# Altium PCB K210-M1W_PCB.pcbdoc
Units mil, origin at the board's own origin, x right, y up, seen from the top; angles counter-clockwise.
Board outline 3119.11 x 2484 mil, 2 copper layers (Top Layer, Bottom Layer); 2 components, 42 nets, 45 pads, 0 vias.
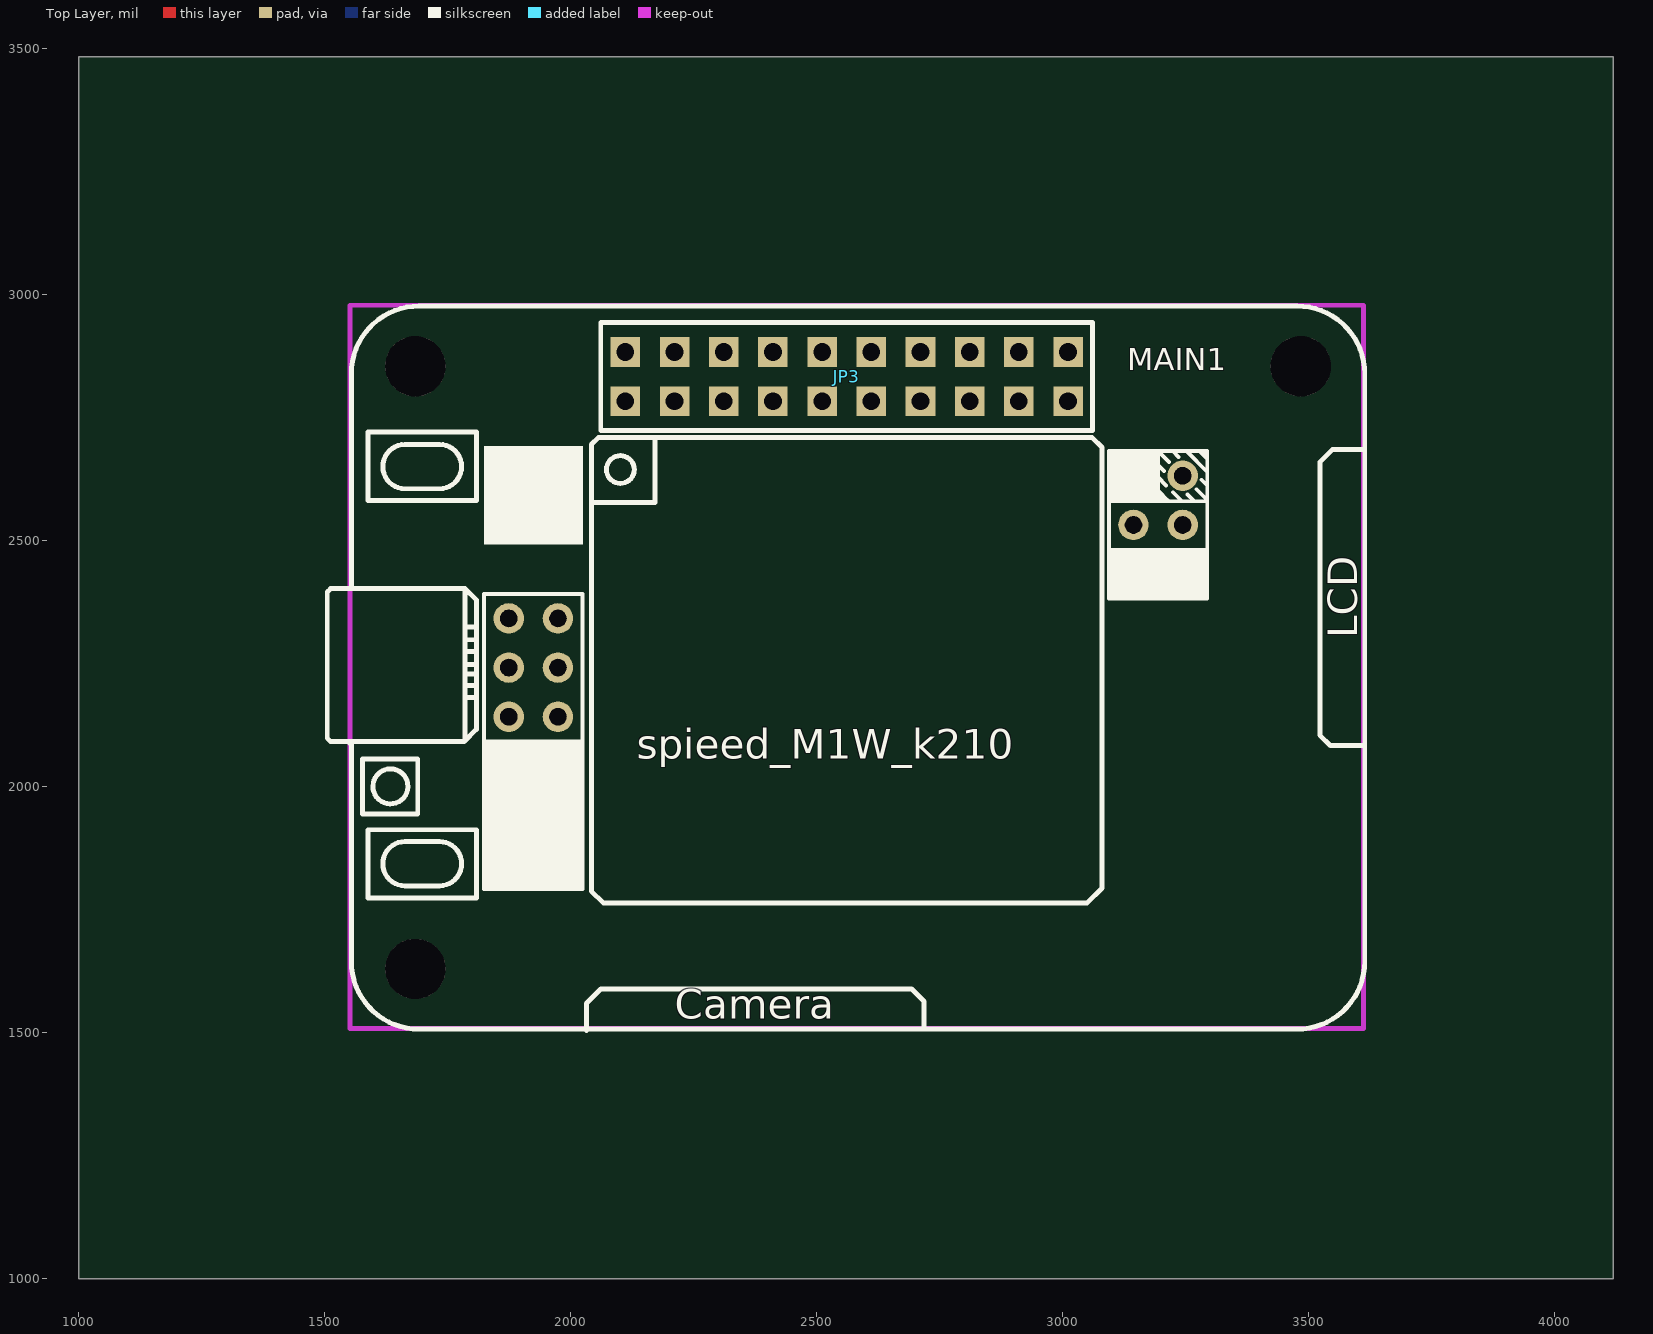
[diagram p0: Top Layer view]
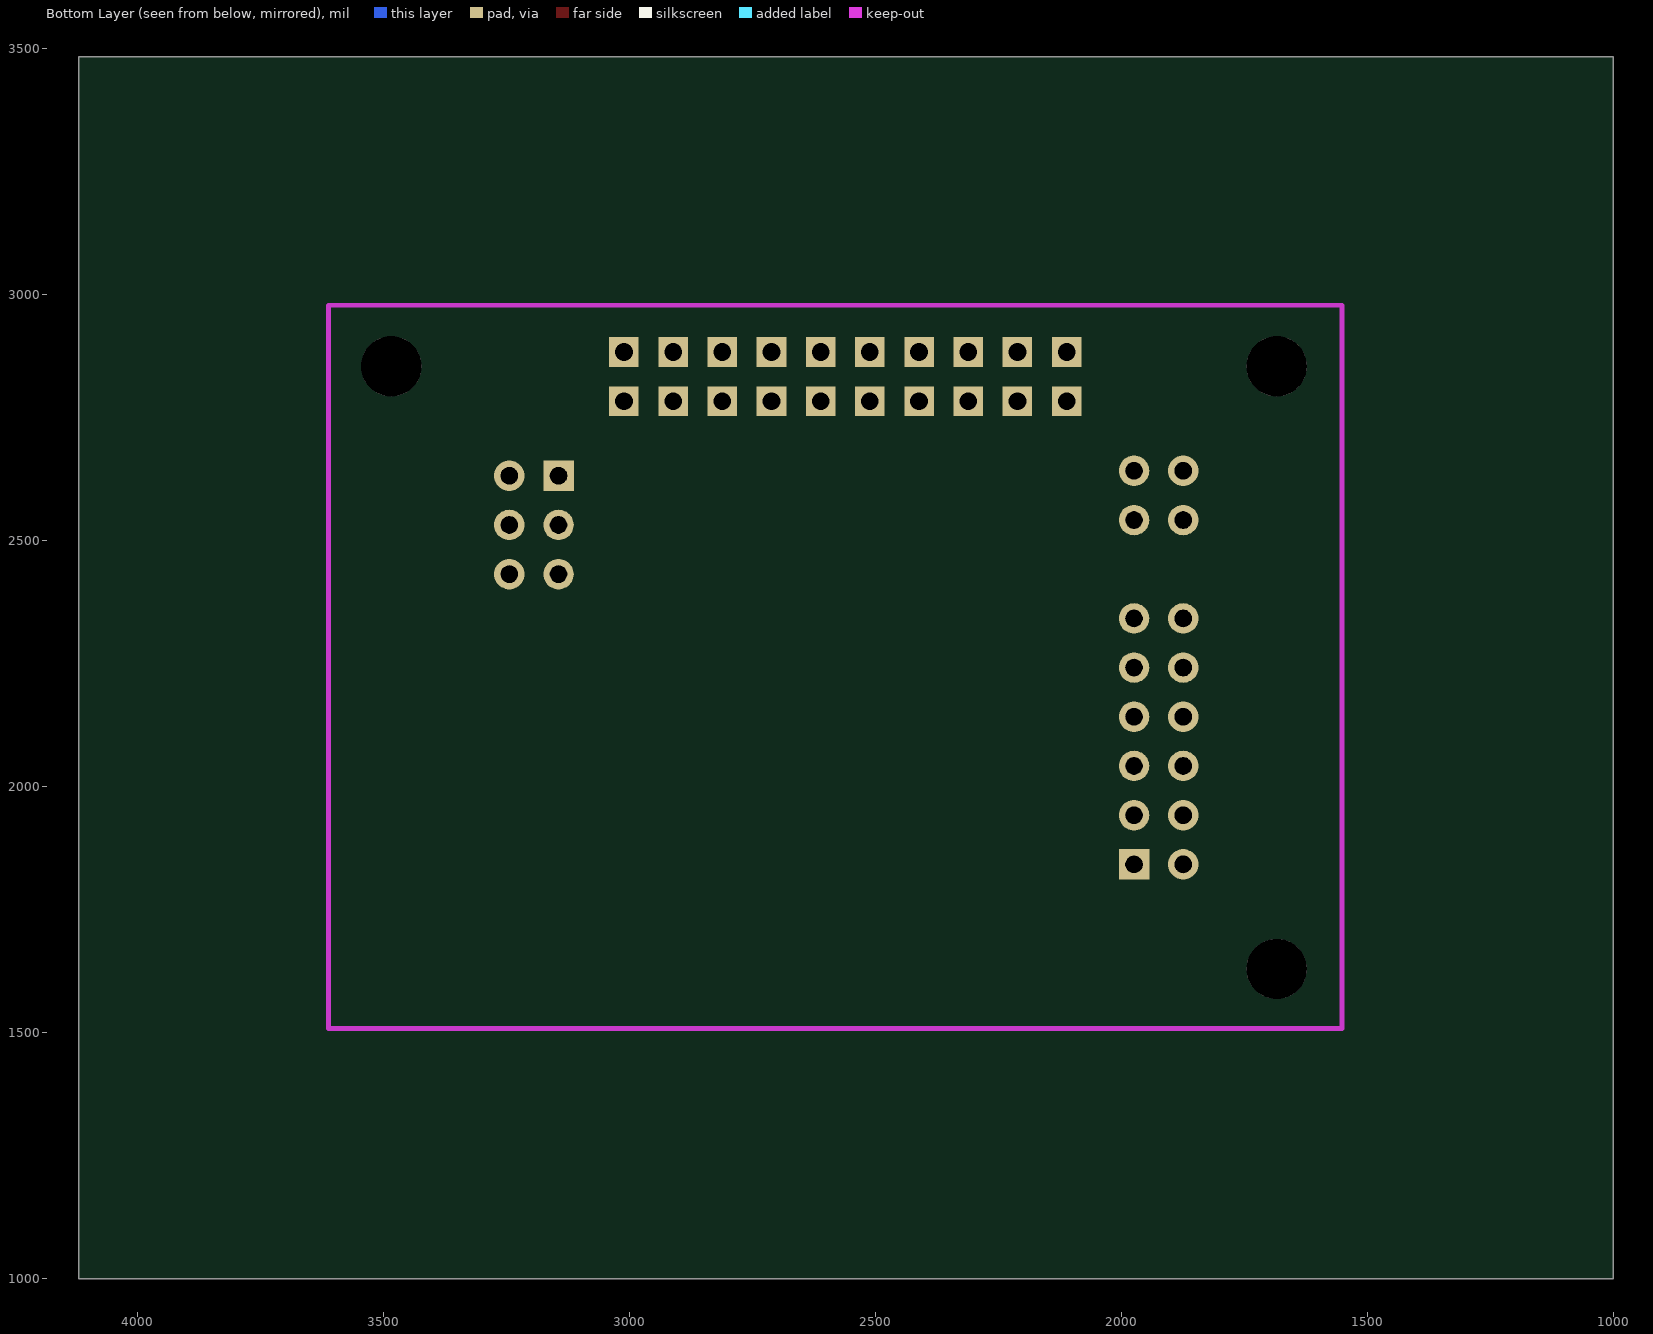
[diagram p1: Bottom Layer view, seen from below]

## Layer stack, top to bottom
Top Solder: solder mask 0.4, Solder Resist, Dk 3.5
Top Layer: signal copper 1.4
Dielectric1: dielectric 12.6, FR-4, Dk 4.8
Bottom Layer: signal copper 1.4
Bottom Solder: solder mask 0.4, Solder Resist, Dk 3.5

## Board outline
4119.11,1000 1000,1000 1000,3484 4119.11,3484

## Design rules (kind name [scope] priority, off if disabled: settings)
Clearance [All] p1: gap=10 ignorepadtopadclearanceinfootprint=FALSE except(0: Arc-Hole Track-Hole SMDPad-Hole THPad-Hole Via-Hole Fill-Hole Poly-Hole Region-Hole Text-Hole)
PolygonConnect [All] p1: connectstyle=Relief reliefconductorwidth=10 reliefentries=4 polygonreliefangle="90 Angle" airgapwidth=10
RoutingVias [All] p1: holewidth=28 width=50 viastyle="Through Hole" minholewidth=28 minwidth=50 maxholewidth=28 maxwidth=50
SolderMaskExpansion [All] p1: expansion=4
Width [All] p1: maxlimit=10 minlimit=10 preferedwidth=10
30 further rules are at their usual default settings.

## Components (designator, comment, footprint, x,y, rotation, side; value= is the part's Value field where it differs from the comment)
JP3 "HEADER 2*10P" "HEADER 2*10P" 2111,2784 r0 top
MAIN1 "maix_dock" MAIX_DOCK 2576,2269 r0 top

## Footprints (in the part's own frame and the unit in brackets; to place one, negate y for a bottom-side part, rotate by r counter-clockwise, add the part's x,y. Pads: shape width x height; smd on the part's side, far side on the other; paste and mask are expansions set on the pad)
"HEADER 2*10P" [mil]
  rect 60x60 hole 36: 1(0,100) 2(0,0) 3(100,100) 4(100,0) 5(200,100) 6(200,0) 7(300,100) 8(300,0) 9(400,100) 10(400,0) 11(500,100) 12(500,0) 13(600,100) 14(600,0) 15(700,100) 16(700,0) 17(800,100) 18(800,0) 19(900,100) 20(900,0)
  silkscreen extent -50,-60 950,160
MAIX_DOCK [mil]
  rect 62x62 hole 35 slot 35.2 at 0 deg: 0(568,363.4) 17(-602,-426.6)
  round 62 hole 35 slot 35.2 at 90 deg: 1(668,363.4) 2(568,263.4) 3(668,263.4) 4(568,163.4) 5(668,163.4) 6(-702,73.4) 7(-602,73.4) 8(-702,-26.6) 9(-602,-26.6) 10(-702,-126.6) 11(-602,-126.6) 12(-702,-226.6) 13(-602,-226.6) 14(-702,-326.6) 15(-602,-326.6) 16(-702,-426.6) 18(-702,373.4) 19(-602,373.4) 20(-702,273.4) 21(-602,273.4)
  round 122.05 hole 122.05 slot 122.25 at 0 deg unplated: ""(-892,-639.2) ""(-892,586) ""(908,586)
  silkscreen extent -1071,-764 1038,708

## Nets (pads, with @x,y where several pads share a name; then routed paths per layer and width w, separated by ;. In a path a pad name is that pad's centre, name@x,y a point inside that pad or via, vN(x,y) a via of type N, cw(c..) or ccw(c..) an arc to the next point about the centre after c; other vN are vias at no path point)
JP3_1: JP3.1
JP3_2: JP3.2
JP3_3: JP3.3
JP3_4: JP3.4
JP3_5: JP3.5
JP3_6: JP3.6
JP3_7: JP3.7
JP3_8: JP3.8
JP3_9: JP3.9
JP3_10: JP3.10
JP3_11: JP3.11
JP3_12: JP3.12
JP3_13: JP3.13
JP3_14: JP3.14
JP3_15: JP3.15
JP3_16: JP3.16
JP3_17: JP3.17
JP3_18: JP3.18
JP3_19: JP3.19
JP3_20: JP3.20
MAIN1_0: MAIN1.0
MAIN1_1: MAIN1.1
MAIN1_2: MAIN1.2
MAIN1_3: MAIN1.3
MAIN1_4: MAIN1.4
MAIN1_5: MAIN1.5
MAIN1_6: MAIN1.6
MAIN1_7: MAIN1.7
MAIN1_8: MAIN1.8
MAIN1_9: MAIN1.9
MAIN1_10: MAIN1.10
MAIN1_11: MAIN1.11
MAIN1_12: MAIN1.12
MAIN1_13: MAIN1.13
MAIN1_14: MAIN1.14
MAIN1_15: MAIN1.15
MAIN1_16: MAIN1.16
MAIN1_17: MAIN1.17
MAIN1_18: MAIN1.18
MAIN1_19: MAIN1.19
MAIN1_20: MAIN1.20
MAIN1_21: MAIN1.21
pads on no net: MAIN1.

## Silkscreen, mask and mechanical layers (free items; w line width, h text height)
Document:
  lines w0.1: 2558.56,2241 2560.56,2243

## Text inside footprints (layer, text, board x,y; h text height)
MAIN1: Top Overlay "Camera" at 2211,1529 h60; Top Overlay "spieed_M1W_k210" at 2134,2057.4 h60; Top Overlay "LCD" at 3599,2302 h60 r90